# Altium PCB DriversBoard.PcbDoc
Units mil, origin at the board's own origin, x right, y up, seen from the top; angles counter-clockwise.
Board outline 5390 x 3465 mil, 2 copper layers (Top Layer, Bottom Layer), stack 52.406 mil thick; 26 components, 20 nets, 75 pads, 223 vias.
Unrouted connection lines stored in the file: 1.
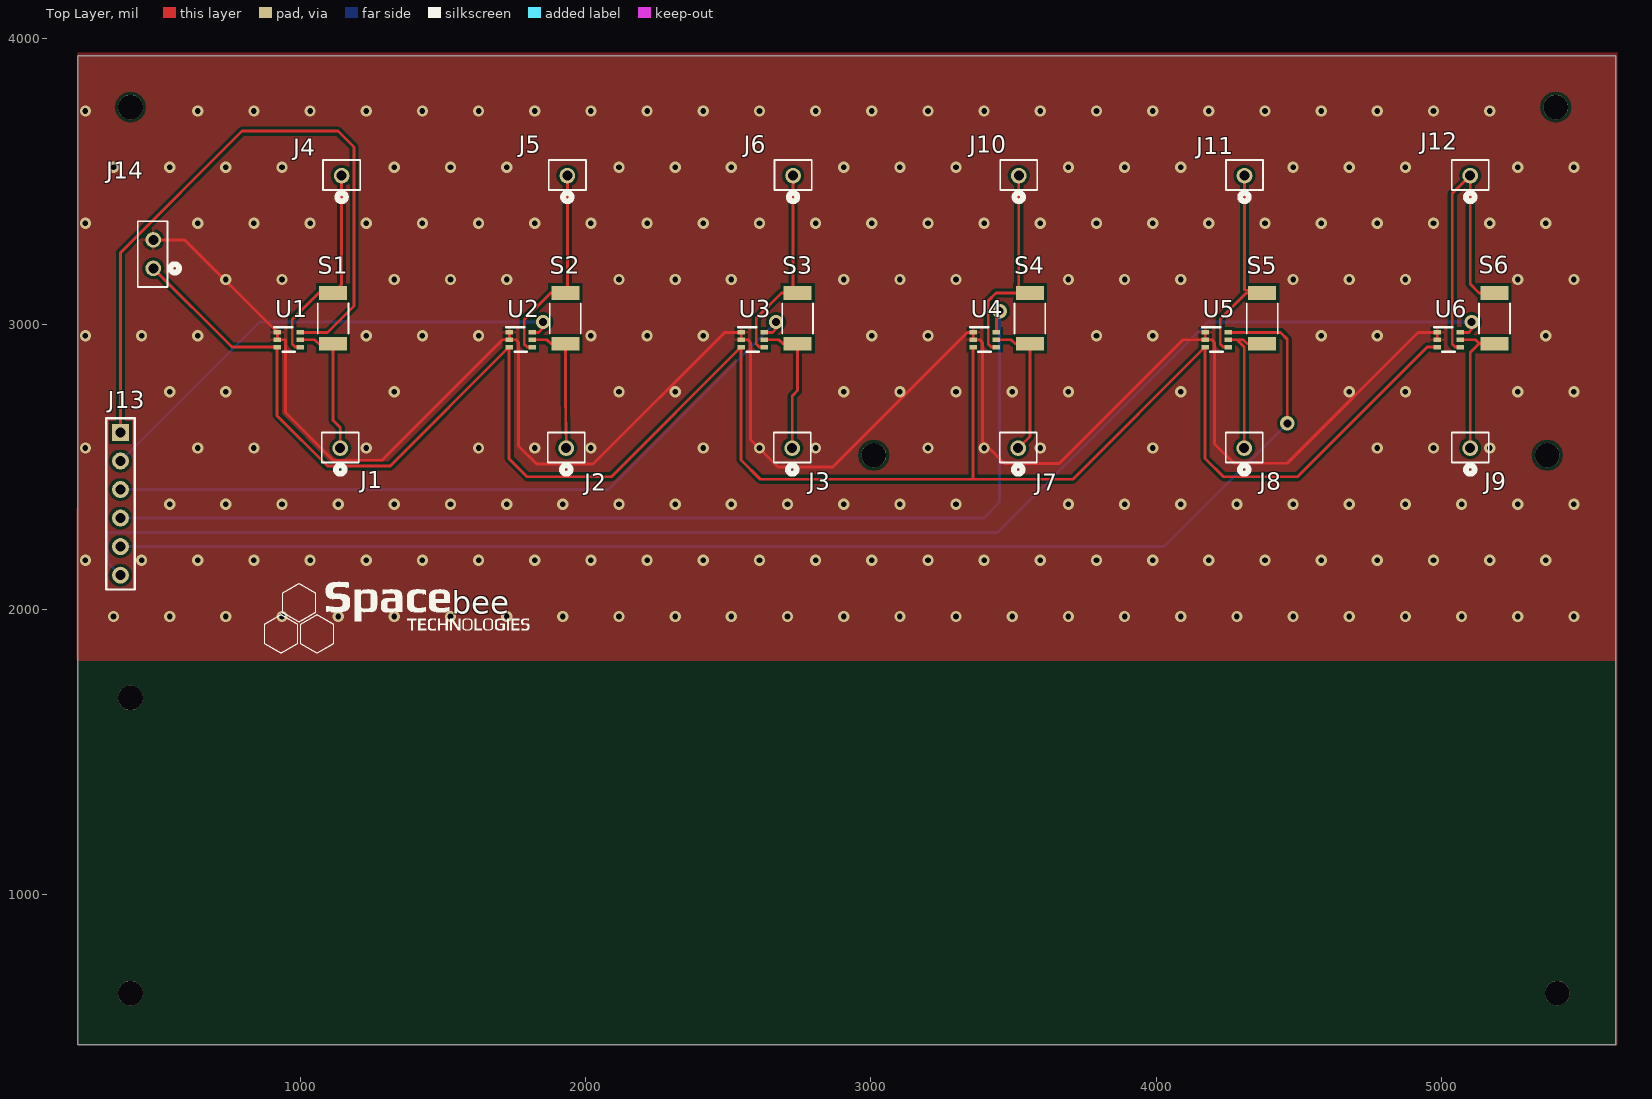
[diagram p0: Top Layer view]
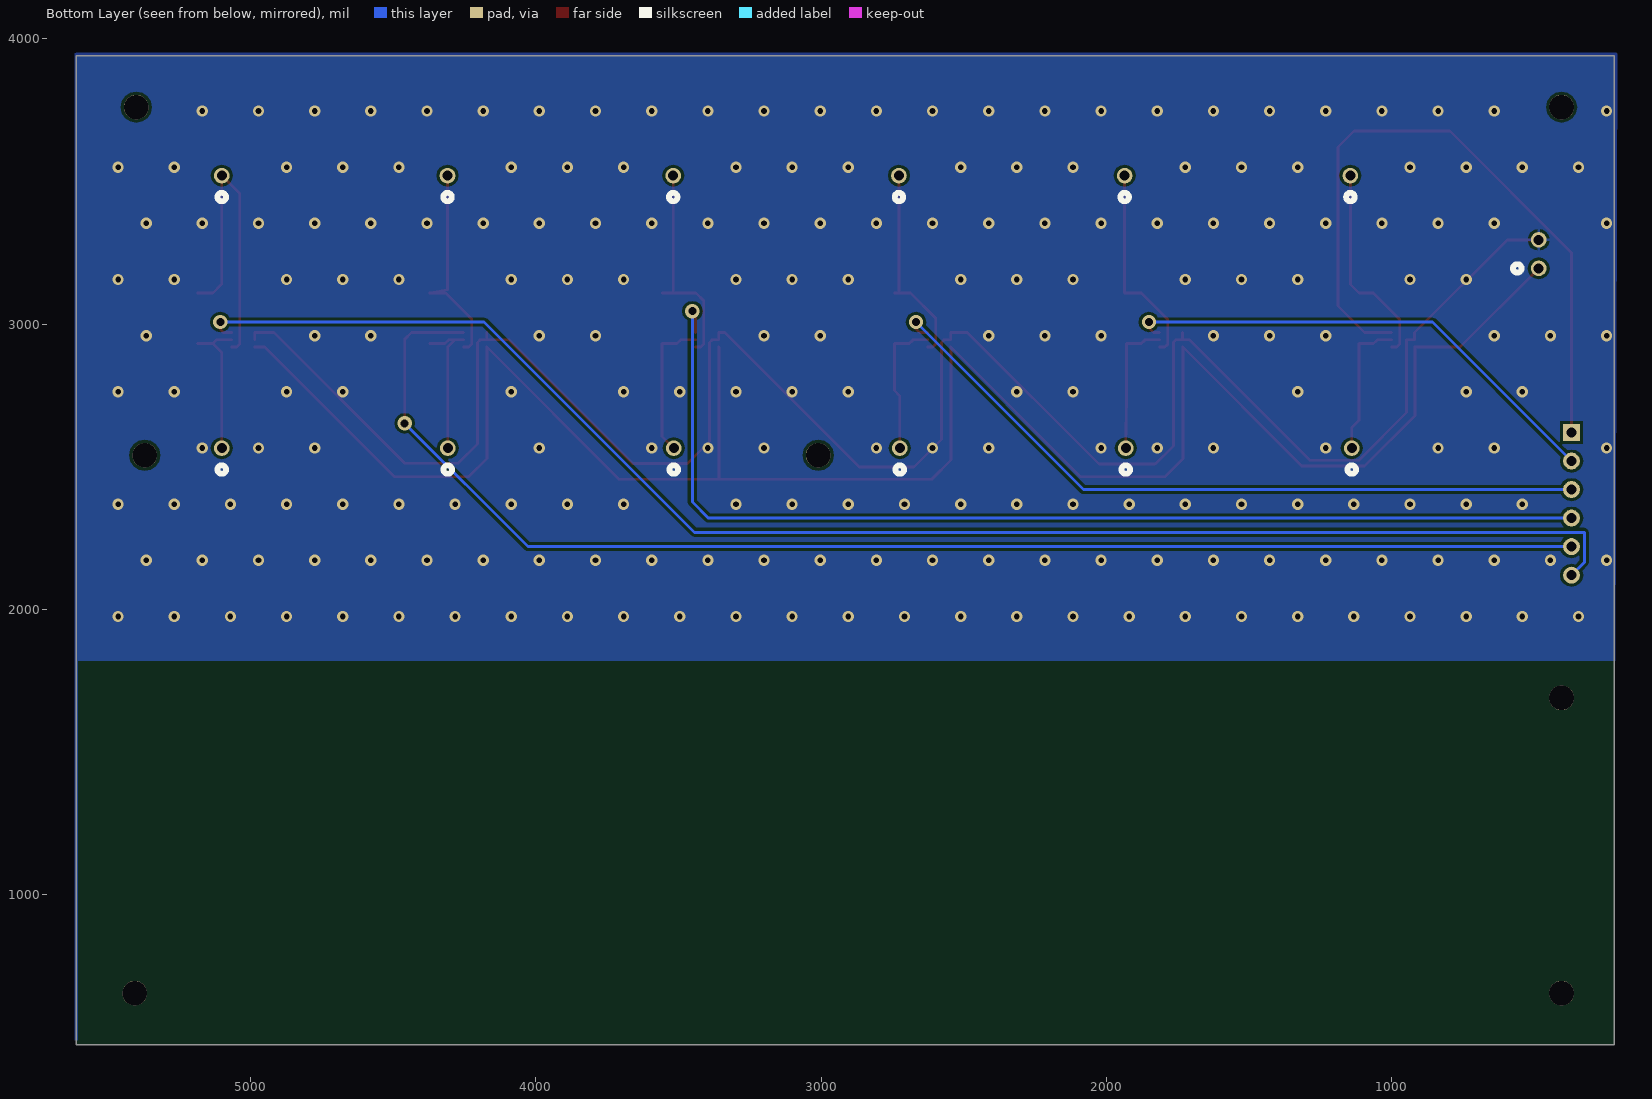
[diagram p1: Bottom Layer view, seen from below]
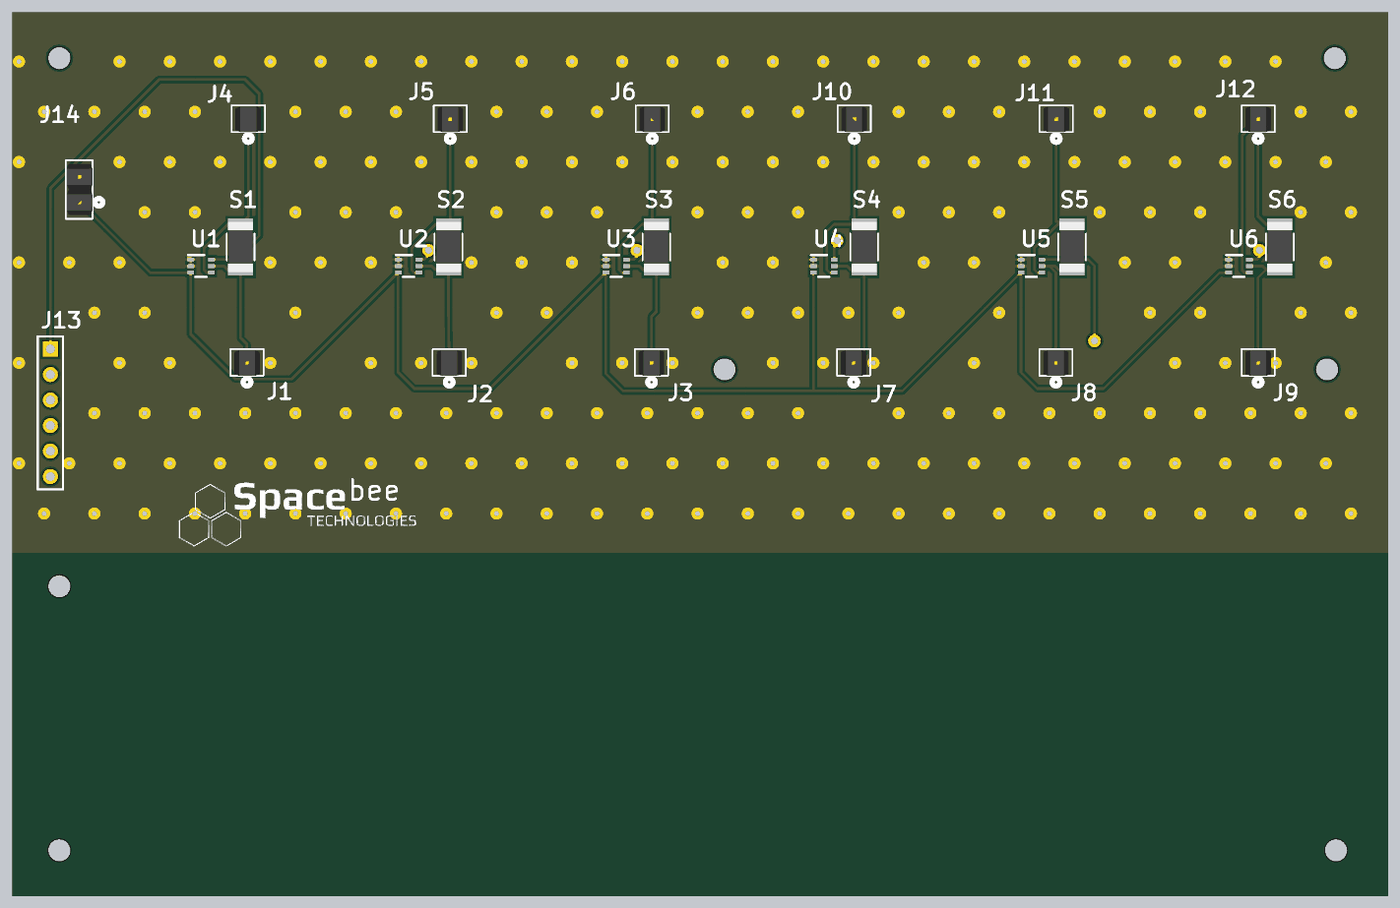
[diagram p2: 3D render of the assembled board from above, using the file's embedded part models]

## Layer stack, top to bottom
Top Solder: solder mask 0.4, Solder Resist, Dk 3.5
Top Layer: signal copper 1.4
Dielectric 1: dielectric 49.6063, FR-4, Dk 4.8
Bottom Layer: signal copper 1.4
Bottom Solder: solder mask 0.4, Solder Resist, Dk 3.5

## Board outline
220,475 5610,475 5610,3940 220,3940

## Design rules (kind name [scope] priority, off if disabled: settings)
Clearance [All] p1: gap=10 ignorepadtopadclearanceinfootprint=FALSE except(0: Arc-Hole Track-Hole SMDPad-Hole THPad-Hole Via-Hole Fill-Hole Poly-Hole Region-Hole Text-Hole)
PolygonConnect [All] p1: connectstyle=Relief reliefconductorwidth=10 reliefentries=4 polygonreliefangle="90 Angle" airgapwidth=10
RoutingVias [All] p1: holewidth=28 width=50 viastyle="Through Hole" minholewidth=28 minwidth=50 maxholewidth=28 maxwidth=50
SolderMaskExpansion [All] p1: expansion=4
Width [All] p1: maxlimit=10 minlimit=10 preferedwidth=10
30 further rules are at their usual default settings.

## Components (designator, comment, footprint, x,y, rotation, side; value= is the part's Value field where it differs from the comment)
J1 "TSW-101-15-T-S" CON1_1X1_TU_TSW 1140,2565 r0 top
J2 "TSW-101-15-T-S" CON1_1X1_TU_TSW 1932,2565 r0 top
J3 "TSW-101-15-T-S" CON1_1X1_TU_TSW 2724,2565 r0 top
J4 "TSW-101-15-T-S" CON1_1X1_TU_TSW 1145,3520 r0 top
J5 "TSW-101-15-T-S" CON1_1X1_TU_TSW 1936,3520 r0 top
J6 "TSW-101-15-T-S" CON1_1X1_TU_TSW 2727,3520 r0 top
J7 "TSW-101-15-T-S" CON1_1X1_TU_TSW 3516,2565 r0 top
J8 "TSW-101-15-T-S" CON1_1X1_TU_TSW 4308,2565 r0 top
J9 "TSW-101-15-T-S" CON1_1X1_TU_TSW 5100,2565 r0 top
J10 "TSW-101-15-T-S" CON1_1X1_TU_TSW 3518,3520 r0 top
J11 "TSW-101-15-T-S" CON1_1X1_TU_TSW 4309,3520 r0 top
J12 "TSW-101-15-T-S" CON1_1X1_TU_TSW 5100,3520 r0 top
J13 "Header 6" HDR1X6 370,2620 r270 top
J14 "TSW-102-05-T-S" CON2_1X2_TU_TSW 485,3245 r90 top
S1 "WSL2010R2000FEA18" RC2010N_VIS 1115,3020 r90 top
S2 "WSL2010R2000FEA18" RC2010N_VIS 1929,3020 r90 top
S3 "WSL2010R2000FEA18" RC2010N_VIS 2743,3020 r90 top
S4 "WSL2010R2000FEA18" RC2010N_VIS 3557,3020 r90 top
S5 "WSL2010R2000FEA18" RC2010N_VIS 4371,3020 r90 top
S6 "WSL2010R2000FEA18" RC2010N_VIS 5185,3020 r90 top
U1 "INA210BQDCKRQ1" DCK0006A_L 960,2945 r0 top
U2 "INA210BQDCKRQ1" DCK0006A_L 1773,2945 r0 top
U3 "INA210BQDCKRQ1" DCK0006A_L 2586,2945 r0 top
U4 "INA210BQDCKRQ1" DCK0006A_L 3399,2945 r0 top
U5 "INA210BQDCKRQ1" DCK0006A_L 4212,2945 r0 top
U6 "INA210BQDCKRQ1" DCK0006A_L 5025,2945 r0 top

## Footprints (in the part's own frame and the unit in brackets; to place one, negate y for a bottom-side part, rotate by r counter-clockwise, add the part's x,y. Pads: shape width x height; smd on the part's side, far side on the other; paste and mask are expansions set on the pad)
CON1_1X1_TU_TSW [mil]
  round 55 hole 35 mask+0: 1(0,0)
  silkscreen extent -65,-90 65,55, body extent -50,-50 50,50, height 500
CON2_1X2_TU_TSW [mil]
  round 55 hole 35 mask+0: 1(-50,0) 2(50,0)
  silkscreen extent -115,-90 115,55, body extent -100,-50 100,50, height 500
DCK0006A_L [mm]
  rect 0.65x0.4 smd paste+0 mask+0.051: 1(-1.025,0.65) 2(-1.025,0) 3(-1.025,-0.65) 4(1.025,-0.65) 5(1.025,0) 6(1.025,0.65)
  silkscreen extent -1.3,-1.07 0.55,1.1, body extent -0.64,-1.02 0.64,1.02, height 1.1
HDR1X6 [mm] "Connector; Header; 6 Position"
  rect 1.5x1.5 hole 0.9: 1(0,0)
  round 1.5 hole 0.9: 2(2.54,0) 3(5.08,0) 4(7.62,0) 5(10.16,0) 6(12.7,0)
  silkscreen extent -1.27,-1.27 13.97,1.27
RC2010N_VIS [mm]
  rect 1.206x2.5 smd paste+0 mask+0: 1(-2.253,0) 2(2.253,0)
  silkscreen extent -1.34,-1.38 1.34,1.38, body extent -2.5,-1.25 2.5,1.25, height 0.71

## Part data
J1 J2 J3 J4 J5 J6 J7 J8 J9 J10 J11 J12 J14: "No Description Available", Mfr_Name="Samtec Inc", Copyright="Copyright (C) 2022 Ultra Librarian. All rights reserved.", RefDes=RefDes, Type=DEV
  J1 J2 J3 J4 J5 J6 J7 J8 J9 J10 J11 J12: Digi-Key_Part_Number_1=SAM12298-ND, Manufacturer_Part_Number=TSW-101-15-T-S
  J14: Digi-Key_Part_Number_1=SAM1019-02-ND, Digi-Key_Part_Number_2=TSW-102-05-T-S-NDL, Digi-Key_Part_Number_3=612-TSW-102-05-T-S-ND, Manufacturer_Part_Number=TSW-102-05-T-S
J13: "Header, 6-Pin", LatestRevisionDate=17-Jul-2002, LatestRevisionNote="Re-released for DXP Platform.", Publisher="Altium Limited"
S1 S2 S3 S4 S5 S6: "No Description Available", Mfr_Name=Vishay, Copyright="Copyright (C) 2022 Ultra Librarian. All rights reserved.", Manufacturer_Part_Number=WSL2010R2000FEA18, RefDes=RefDes, Type=DEV
U1 U2 U3 U4 U5 U6: "No Description Available", Mfr_Name="Texas Instruments", Copyright="Copyright (C) 2022 Ultra Librarian. All rights reserved.", Manufacturer_Part_Number=INA210BQDCKRQ1, RefDes=RefDes, Type=DEV

## Free pads (board coordinates)
  round 86.61 hole 86.61 unplated: 3(405,655) 3(405,1690) 3(405,3760) 3(3010,2540) 3(5370,2540) 3(5400,3760) 3(5405,655)

## Via types
v1: diameter 39.37, hole 19.68, Top Layer to Bottom Layer, 218 vias
v2: diameter 50, hole 28, Top Layer to Bottom Layer, 5 vias

## Nets (pads, with @x,y where several pads share a name; then routed paths per layer and width w, separated by ;. In a path a pad name is that pad's centre, name@x,y a point inside that pad or via, vN(x,y) a via of type N, cw(c..) or ccw(c..) an arc to the next point about the centre after c; other vN are vias at no path point)
+5V_Supply: J14.1 U1.3 U2.3 U3.3 U4.3 U5.3 U6.3 | length 7393.9
  Top Layer w10: J14.1 760.59,2919.41 U1.3@919,2919.41 ; U1.3 U1.3@919,2919.41 ; U2.3 U2.3@1732,2919.41 ; U3.3 U3.3@2545,2919.41 ; U4.3 3358,2919.41 3358,2456 ; U5.3 U5.3@4171,2919.41 ; U6.3 4949.41,2919.41 4495,2465 4235,2465 4171,2529 U5.3@4171,2919.41 ; U1.3@919,2919.41 919,2678.5 1095,2502.5 1315.09,2502.5 U2.3@1732,2919.41 ; U2.3@1732,2919.41 1732,2528 1795,2465 2090.59,2465 U3.3@2545,2919.41 ; U3.3@2545,2919.41 2545,2523 2612,2456 3358,2456 ; 3358,2456 3707.59,2456 U5.3@4171,2919.41
GND: J14.2 U1.1 U1.2 U2.1 U2.2 U3.1 U3.2 U4.1 U4.2 U5.1 U5.2 U6.1 U6.2 | length 7591
  Top Layer w10: J14.2 595.24,3295 U1.1 U1.2 948,2945 948,2689.5 1115,2522.5 1286.5,2522.5 1709,2945 U2.2 ; U2.1 U2.2 ; U5.1 U5.2 ; U6.2 U6.1 4917.59,2970.59 4459,2512 4272,2512 4204,2580 4204,2935 4194,2945 U5.2 ; U2.2 1756,2945 1765,2936 1765,2573 1829,2509 2026,2509 2487.59,2970.59 U3.1 U3.2 2568,2945 2578,2935 2578,2595 2674,2499 2866,2499 3337.59,2970.59 U4.1 U4.2 3381,2945 3391,2935 3391,2588 3468,2511 3660,2511 4094,2945 U5.2
  other v1: 345.39,1974.96 542.24,1974.96 739.09,1974.96 935.95,1974.96 1132.8,1974.96 1329.65,1974.96 1526.5,1974.96 1723.35,1974.96 1920.2,1974.96 2117.05,1974.96 2313.9,1974.96 2510.75,1974.96 2707.6,1974.96 2904.45,1974.96 3101.3,1974.96 3298.15,1974.96 3495,1974.96 3691.85,1974.96 3888.7,1974.96 4085.55,1974.96 4282.4,1974.96 4479.25,1974.96 4676.1,1974.96 4872.95,1974.96 5069.8,1974.96 5266.65,1974.96 5463.5,1974.96 246.97,2171.81 443.82,2171.81 640.67,2171.81 837.52,2171.81 1034.37,2171.81 1231.22,2171.81 1428.07,2171.81 1624.92,2171.81 1821.77,2171.81 2018.62,2171.81 2215.47,2171.81 2412.32,2171.81 2609.17,2171.81 2806.02,2171.81 3002.87,2171.81 3199.72,2171.81 3396.58,2171.81 3593.43,2171.81 3790.28,2171.81 3987.13,2171.81 4183.98,2171.81 4380.83,2171.81 4577.68,2171.81 4774.53,2171.81 4971.38,2171.81 5168.23,2171.81 5365.08,2171.81 542.24,2368.66 739.09,2368.66 935.95,2368.66 1132.8,2368.66 1329.65,2368.66 1526.5,2368.66 1723.35,2368.66 1920.2,2368.66 2117.05,2368.66 2313.9,2368.66 2510.75,2368.66 2707.6,2368.66 2904.45,2368.66 3101.3,2368.66 3298.15,2368.66 3691.85,2368.66 3888.7,2368.66 4085.55,2368.66 4282.4,2368.66 4479.25,2368.66 4676.1,2368.66 4872.95,2368.66 5069.8,2368.66 5266.65,2368.66 5463.5,2368.66 246.97,2565.51 640.67,2565.51 837.52,2565.51 1231.22,2565.51 1624.92,2565.51 1821.77,2565.51 2018.62,2565.51 2412.32,2565.51 2609.17,2565.51 2806.02,2565.51 3199.72,2565.51 3396.58,2565.51 3593.43,2565.51 3987.13,2565.51 4774.53,2565.51 4971.38,2565.51 5168.23,2565.51 542.24,2762.36 739.09,2762.36 1329.65,2762.36 2117.05,2762.36 2313.9,2762.36 2904.45,2762.36 3101.3,2762.36 3298.15,2762.36 3495,2762.36 3691.85,2762.36 4085.55,2762.36 4676.1,2762.36 4872.95,2762.36 5266.65,2762.36 5463.5,2762.36 246.97,2959.21 443.82,2959.21 640.67,2959.21 1231.22,2959.21 1428.07,2959.21 1624.92,2959.21 2018.62,2959.21 2215.47,2959.21 2412.32,2959.21 3002.87,2959.21 3199.72,2959.21 3790.28,2959.21 3987.13,2959.21 4577.68,2959.21 4774.53,2959.21 5365.08,2959.21 739.09,3156.06 935.95,3156.06 1329.65,3156.06 1526.5,3156.06 1723.35,3156.06 2117.05,3156.06 2313.9,3156.06 2510.75,3156.06 2904.45,3156.06 3101.3,3156.06 3298.15,3156.06 3691.85,3156.06 3888.7,3156.06 4085.55,3156.06 4479.25,3156.06 4676.1,3156.06 4872.95,3156.06 5266.65,3156.06 5463.5,3156.06 246.97,3352.91 640.67,3352.91 837.52,3352.91 1034.37,3352.91 1231.22,3352.91 1428.07,3352.91 1624.92,3352.91 1821.77,3352.91 2018.62,3352.91 2215.47,3352.91 2412.32,3352.91 2609.17,3352.91 2806.02,3352.91 3002.87,3352.91 3199.72,3352.91 3396.58,3352.91 3593.43,3352.91 3790.28,3352.91 3987.13,3352.91 4183.98,3352.91 4380.83,3352.91 4577.68,3352.91 4774.53,3352.91 4971.38,3352.91 5168.23,3352.91 5365.08,3352.91 345.39,3549.76 542.24,3549.76 739.09,3549.76 935.95,3549.76 1329.65,3549.76 1526.5,3549.76 1723.35,3549.76 2117.05,3549.76 2313.9,3549.76 2510.75,3549.76 2904.45,3549.76 3101.3,3549.76 3298.15,3549.76 3691.85,3549.76 3888.7,3549.76 4085.55,3549.76 4479.25,3549.76 4676.1,3549.76 4872.95,3549.76 5266.65,3549.76 5463.5,3549.76 246.97,3746.61 640.67,3746.61 837.52,3746.61 1034.37,3746.61 1231.22,3746.61 1428.07,3746.61 1624.92,3746.61 1821.77,3746.61 2018.62,3746.61 2215.47,3746.61 2412.32,3746.61 2609.17,3746.61 2806.02,3746.61 3002.87,3746.61 3199.72,3746.61 3396.58,3746.61 3593.43,3746.61 3790.28,3746.61 3987.13,3746.61 4183.98,3746.61 4380.83,3746.61 4577.68,3746.61 4774.53,3746.61 4971.38,3746.61 5168.23,3746.61
NetJ1_1: J1.1 S1.1 U1.5 | length 497
  Top Layer w10: U1.5 1050,2945 1063.69,2931.31 S1.1 1115,2662.91 1140,2637.91 J1.1
NetJ2_1: J2.1 S2.1 U2.5 | length 487.6
  Top Layer w10: U2.5 1864,2945 1877.69,2931.31 S2.1 1929,2751 J2.1
NetJ3_1: J3.1 S3.1 U3.5 | length 496.5
  Top Layer w10: U3.5 2677,2945 2690.69,2931.31 S3.1 2743,2767 2724,2748 J3.1
NetJ4_1: J4.1 S1.2 U1.4 | length 723.7
  Top Layer w10: U1.4 982.59,2919.41 972,2930 972,3015.69 1065,3108.69 S1.2 1145,3138.69 J4.1
NetJ5_1: J5.1 S2.2 U2.4 | length 719.8
  Top Layer w10: U2.4 1795,2919.41 1785,2929.41 1785,3016 1877.69,3108.69 S2.2 1936,3108.69 J5.1
NetJ6_1: J6.1 S3.2 U3.4 | length 715.8
  Top Layer w10: U3.4 2608.59,2919.41 2598,2930 2598,3020 2686.69,3108.69 S3.2@2727,3108.69 ; J6.1 S3.2@2727,3108.69 ; S3.2 S3.2@2727,3108.69
NetJ7_1: J7.1 S4.1 U4.5 | length 506.6
  Top Layer w10: U4.5 3491,2945 3504.69,2931.31 S4.1 3557,2606 J7.1
NetJ8_1: J8.1 S5.1 U5.5 | length 514.7
  Top Layer w10: U5.5 4283,2945 ; J8.1 4308,2920 4283,2945 ; S5.1 4317.69,2931.31 4304,2945 4283,2945
NetJ9_1: J9.1 S6.1 U6.5 | length 558.4
  Top Layer w10: U6.5 5118,2945 5131.5,2931.5 ; J9.1 5100,2900 5131.5,2931.5 ; 5131.5,2931.5 S6.1 5131.69,2931.31 5131.5,2931.5
NetJ10_1: J10.1 S4.2 U4.4 | length 752.9
  Top Layer w10: U4.4 3421.59,2919.41 3411,2930 3411,3081.65 3438.05,3108.69 S4.2@3518,3108.69 ; J10.1 S4.2@3518,3108.69 ; S4.2 S4.2@3518,3108.69
NetJ11_1: J11.1 S5.2 U5.4 | length 768.1
  Top Layer w10: U5.4 4234.59,2919.41 4224,2930 4224,3017.69 4315,3108.69 S5.2 4309,3120 J11.1
NetJ12_1: J12.1 S6.2 U6.4 | length 1126.8
  Top Layer w10: U6.4 5047.59,2919.41 5037,2930 5037,3457 J12.1 5100,3140 5131.31,3108.69 S6.2
Shunt_Out1: J13.1 U1.6 | length 2430.2
  Top Layer w10: J13.1 370,3250 796,3676 1132,3676 1188,3620 1188,3063.59 1095,2970.59 U1.6
Shunt_Out2: J13.2 U2.6 | length 1747.4
  Top Layer w10: U2.6 1835,2970.59 1851,2986.59 v2(1851,3007)
  Bottom Layer w10: J13.2 857,3007 v2(1851,3007)
Shunt_Out3: J13.3 U3.6 | length 2610.2
  Top Layer w10: U3.6 2655,2970.59 2667,2982.59 v2(2667,3007)
  Bottom Layer w10: J13.3 2080,2420 v2(2667,3007)
Shunt_Out4: J13.4 U4.6 | length 3852.8
  Top Layer w10: U4.6 3440,2970.59 3440,3034 v2(3451,3045)
  Bottom Layer w10: J13.4 3395,2320 3451,2376 v2(3451,3045)
Shunt_Out5: J13.5 U5.6 | length 4779.1
  Top Layer w10: U5.6 4435,2970.59 4459,2946.59 v2(4459,2652)
  Bottom Layer w10: J13.5 4027,2220 v2(4459,2652)
Shunt_Out6: J13.6 U6.6 | length 5323.5
  Top Layer w10: U6.6 5095,2970.59 5105,2980.59 v2(5105,3007)
  Bottom Layer w10: J13.6 325,2165 325,2269 326,2270 3444,2270 4181,3007 v2(5105,3007)

## Polygon pours and split planes (outlines as drawn)
GND on Bottom Layer "GND_Bottom" (solid, pour order 2): 210,3950 5610,3950 5615,3955 5615,490 235,490 220,475
GND on Top Layer "GND_Top" (solid, pour order 0): 220,3950 5615,3950 5615,470 5616.25,468.75 215,468.75

## Other copper
Top Layer:
  pour cut-out: 215,1820 5610,1820 5610,468.75 215,468.75
Bottom Layer:
  pour cut-out: 210,1820 5605,1820 5605,465 210,465

## Silkscreen, mask and mechanical layers (free items; w line width, h text height)
Top Overlay:
  drawing of 20 lines, arcs and shapes, not listed
  text "bee" at 1530,1985 h78.74